# Altium PCB Coil_v3r1.PcbDoc (part 5 of 5)
Units mm, origin at the board's own origin, x right, y up, seen from the top; angles counter-clockwise.
Board outline 72 x 72 mm, 4 copper layers (Top Layer, Signal Layer 1, Signal Layer 2, Bottom Layer), stack 0.778 mm thick; 2 components, 0 nets, 15 pads, 374 vias.
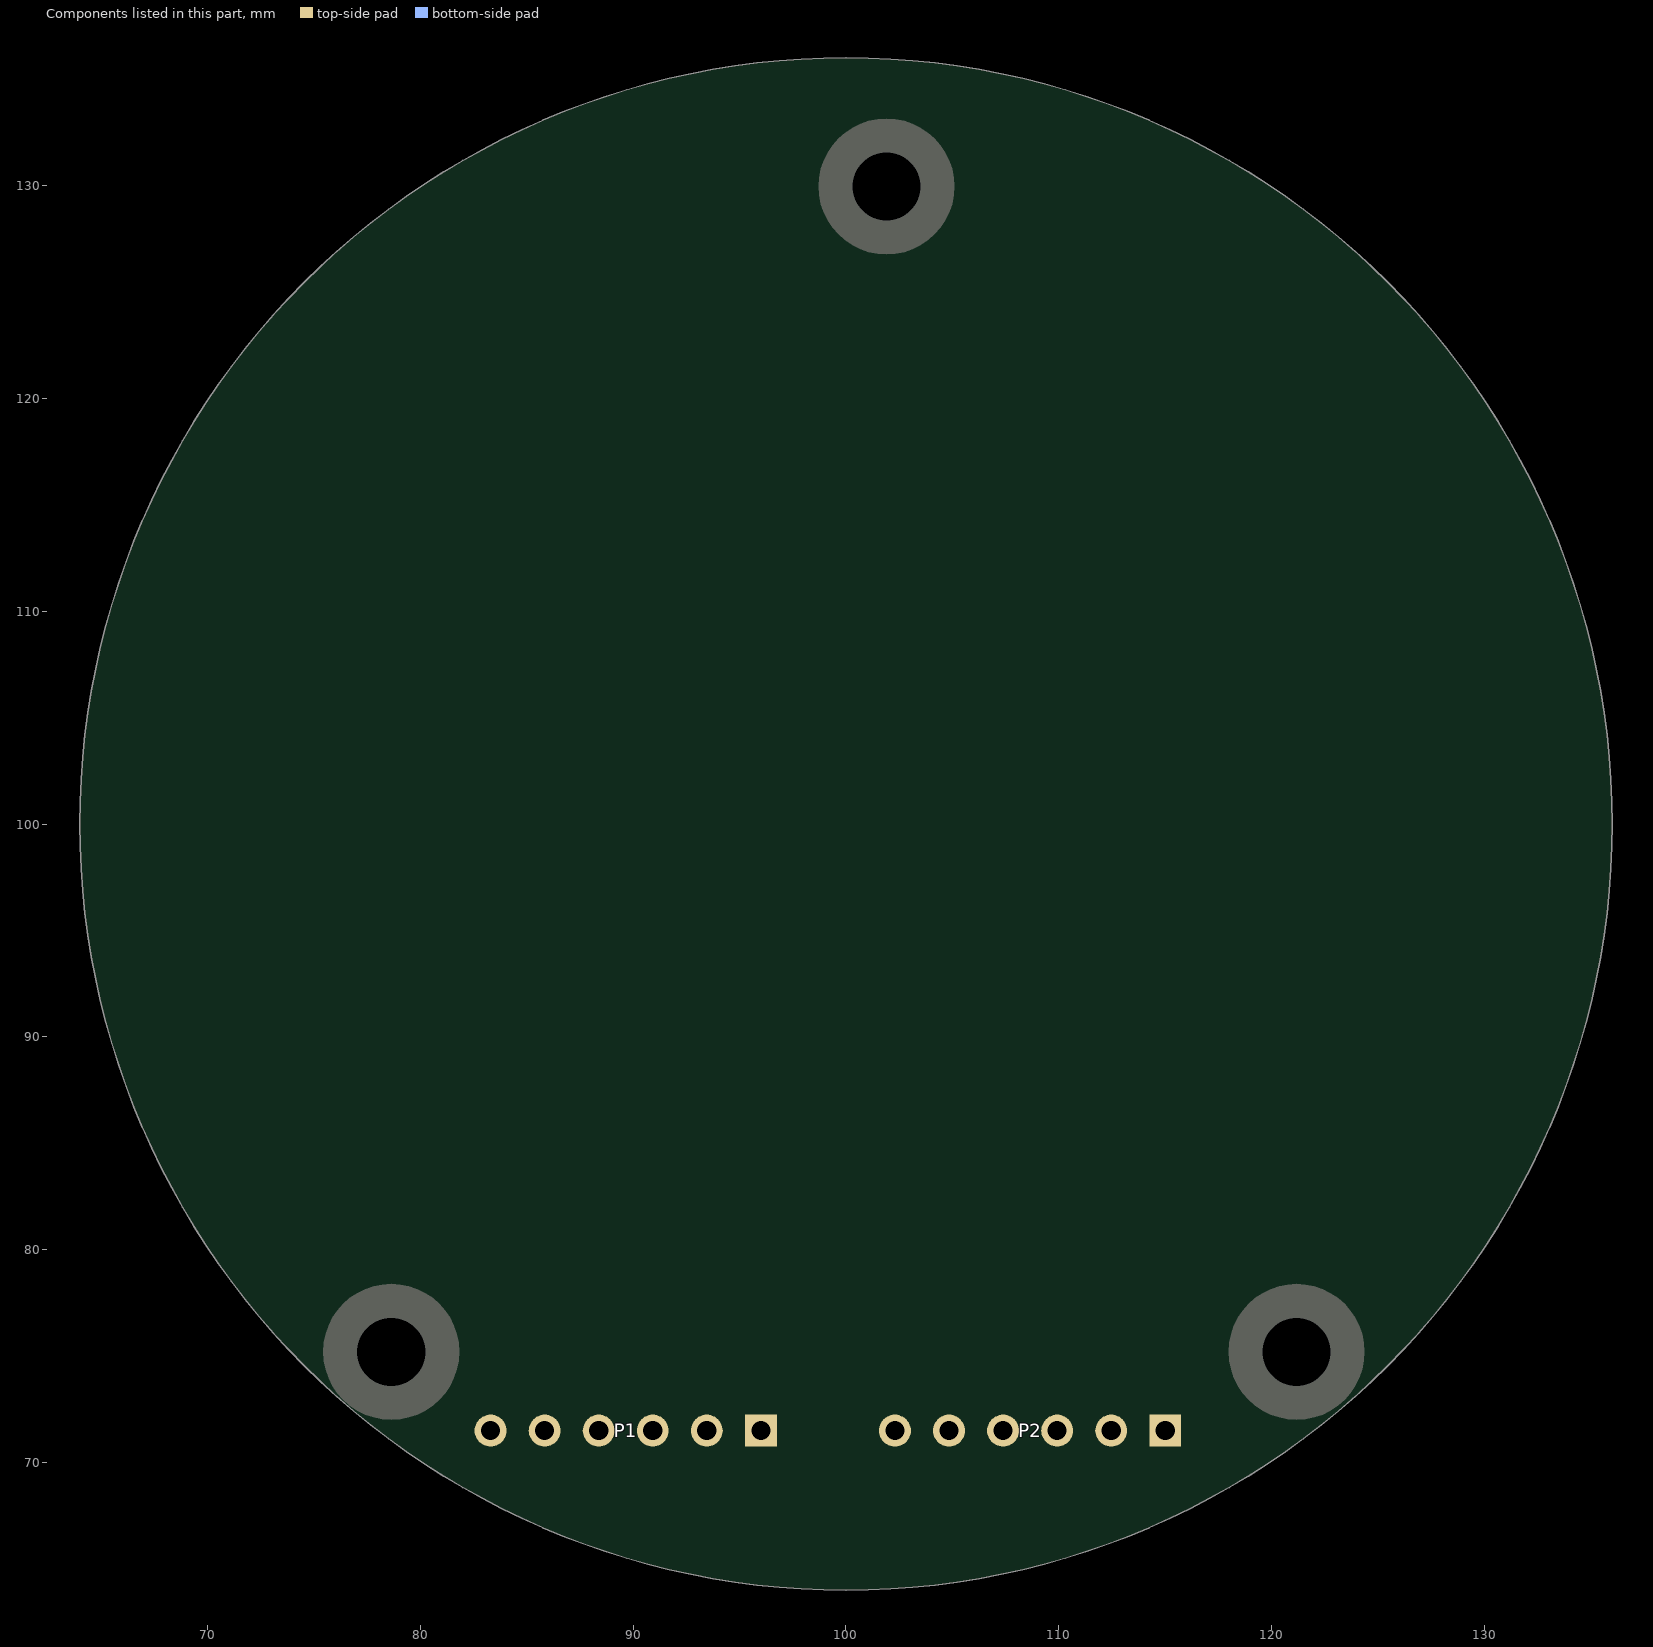
[diagram p7: the components of this part, seen from the top]

## Via types
v1: diameter 0.406, hole 0.305, Top Layer to Bottom Layer, 374 vias

## Nets (pads, with @x,y where several pads share a name; then routed paths per layer and width w, separated by ;. In a path a pad name is that pad's centre, name@x,y a point inside that pad or via, vN(x,y) a via of type N, cw(c..) or ccw(c..) an arc to the next point about the centre after c; other vN are vias at no path point) (continued)
copper on no net: (continued)
  Signal Layer 2 w0.1: v1(107.408,101.173) 107.433,101.124 107.491,101.079 107.582,101.039 107.705,101.001 107.86,100.965 108.043,100.931 108.254,100.897 108.49,100.862 108.749,100.827 109.028,100.79 109.324,100.75 109.633,100.707 109.953,100.661 110.28,100.611 110.61,100.556 110.94,100.497 111.266,100.433 111.585,100.364 111.893,100.291 112.186,100.213 112.461,100.13 112.716,100.044 112.947,99.955 113.152,99.862 113.329,99.767 113.476,99.671 113.59,99.573 113.672,99.475 113.719,99.377 v1(113.731,99.28) ; v1(107.482,115.82) 107.593,115.786 107.72,115.784 107.862,115.811 108.02,115.867 108.193,115.951 108.383,116.06 108.587,116.192 108.806,116.346 109.039,116.518 109.284,116.706 109.541,116.907 109.808,117.118 110.084,117.335 110.367,117.556 110.655,117.776 110.946,117.994 111.239,118.206 111.531,118.408 111.82,118.598 112.105,118.774 112.382,118.931 112.651,119.068 112.909,119.183 113.154,119.273 113.384,119.338 113.598,119.375 113.795,119.385 113.973,119.365 114.13,119.316 v1(114.267,119.237) ; v1(107.49,99.607) 107.504,99.554 107.552,99.498 107.632,99.44 107.745,99.377 107.889,99.31 108.061,99.238 108.26,99.161 108.484,99.078 108.73,98.99 108.995,98.896 109.276,98.795 109.57,98.689 109.873,98.577 110.183,98.46 110.494,98.338 110.805,98.211 111.11,98.081 111.407,97.947 111.693,97.812 111.964,97.675 112.216,97.537 112.447,97.4 112.655,97.264 112.836,97.131 112.99,97.001 113.113,96.876 113.205,96.757 113.264,96.644 113.289,96.538 v1(113.281,96.441) ; v1(107.49,100.393) 107.509,100.341 107.563,100.291 107.649,100.24 107.768,100.19 107.917,100.138 108.096,100.085 108.303,100.029 108.534,99.97 108.788,99.908 109.061,99.842 109.351,99.771 109.655,99.697 109.968,99.617 110.288,99.533 110.61,99.444 110.932,99.35 111.25,99.253 111.56,99.151 111.858,99.046 112.141,98.938 112.407,98.827 112.651,98.715 112.872,98.602 113.066,98.488 113.232,98.375 113.368,98.264 113.471,98.155 113.542,98.049 113.578,97.946 v1(113.581,97.849) ; v1(108.069,77.45) 108.21,77.52 108.338,77.624 108.454,77.76 108.555,77.929 108.643,78.128 108.717,78.355 108.778,78.61 108.826,78.888 108.861,79.187 108.885,79.505 108.897,79.839 108.9,80.185 108.894,80.541 108.88,80.902 108.861,81.265 108.837,81.627 108.811,81.985 108.784,82.335 108.757,82.674 108.733,82.999 108.713,83.308 108.699,83.597 108.693,83.864 108.696,84.108 108.711,84.326 108.738,84.517 108.779,84.679 108.835,84.812 108.907,84.916 v1(108.997,84.99) ; v1(108.997,115.01) 109.104,114.966 109.23,114.951 109.374,114.964 109.536,115.005 109.717,115.071 109.916,115.161 110.133,115.273 110.366,115.404 110.614,115.553 110.877,115.716 111.152,115.89 111.439,116.074 111.735,116.263 112.038,116.455 112.346,116.646 112.657,116.835 112.969,117.017 113.28,117.19 113.586,117.35 113.886,117.497 114.178,117.626 114.459,117.736 114.727,117.825 114.979,117.891 115.215,117.933 115.432,117.949 115.629,117.939 115.804,117.902 115.956,117.837 v1(116.084,117.746) ; v1(110.24,78.349) 110.374,78.433 110.492,78.549 110.593,78.696 110.677,78.874 110.745,79.08 110.797,79.314 110.833,79.573 110.853,79.854 110.859,80.156 110.851,80.475 110.83,80.808 110.799,81.153 110.758,81.506 110.71,81.864 110.655,82.224 110.596,82.582 110.534,82.935 110.473,83.281 110.413,83.616 110.357,83.937 110.307,84.242 110.265,84.528 110.233,84.794 110.212,85.037 110.205,85.255 110.213,85.448 110.238,85.613 110.281,85.751 110.343,85.862 v1(110.425,85.944) ; v1(110.425,114.056) 110.527,114.002 110.651,113.975 110.795,113.974 110.961,113.998 111.148,114.046 111.355,114.116 111.581,114.206 111.826,114.314 112.088,114.437 112.365,114.574 112.656,114.721 112.959,114.875 113.272,115.034 113.593,115.196 113.918,115.356 114.246,115.513 114.575,115.664 114.901,115.805 115.221,115.935 115.534,116.051 115.837,116.151 116.128,116.234 116.403,116.296 116.661,116.337 116.9,116.355 117.117,116.35 117.312,116.321 117.482,116.267 117.627,116.188 v1(117.746,116.084) ; v1(111.752,87.033) 111.679,86.944 111.628,86.828 111.599,86.686 111.591,86.519 111.601,86.326 111.63,86.11 111.674,85.87 111.732,85.609 111.802,85.328 111.881,85.029 111.969,84.715 112.061,84.388 112.156,84.05 112.252,83.704 112.346,83.354 112.436,83.001 112.519,82.65 112.594,82.302 112.659,81.962 112.712,81.633 112.751,81.316 112.775,81.015 112.783,80.733 112.773,80.472 112.744,80.234 112.697,80.022 112.63,79.837 112.544,79.68 112.438,79.554 v1(112.313,79.457) ; v1(111.752,112.967) 111.849,112.902 111.969,112.863 112.113,112.848 112.28,112.856 112.471,112.886 112.684,112.935 112.918,113.002 113.172,113.086 113.444,113.183 113.734,113.292 114.038,113.409 114.355,113.533 114.682,113.661 115.016,113.79 115.356,113.918 115.698,114.042 116.04,114.16 116.378,114.269 116.71,114.366 117.033,114.451 117.344,114.521 117.641,114.575 117.921,114.61 118.182,114.625 118.421,114.62 118.637,114.594 118.828,114.545 118.992,114.475 119.129,114.382 v1(119.237,114.267) ; v1(112.967,88.248) 112.902,88.151 112.863,88.031 112.848,87.887 112.856,87.72 112.886,87.529 112.935,87.316 113.002,87.082 113.086,86.828 113.183,86.556 113.292,86.266 113.409,85.962 113.533,85.645 113.661,85.318 113.79,84.984 113.918,84.644 114.042,84.302 114.16,83.96 114.269,83.622 114.366,83.29 114.451,82.967 114.521,82.656 114.575,82.359 114.61,82.079 114.625,81.818 114.62,81.579 114.594,81.363 114.545,81.172 114.475,81.008 114.382,80.871 v1(114.267,80.763) ; v1(112.967,111.752) 113.056,111.679 113.172,111.628 113.314,111.599 113.481,111.591 113.674,111.601 113.89,111.63 114.13,111.674 114.391,111.732 114.672,111.802 114.971,111.881 115.285,111.969 115.612,112.061 115.95,112.156 116.296,112.252 116.646,112.346 116.999,112.436 117.35,112.519 117.698,112.594 118.038,112.659 118.367,112.712 118.684,112.751 118.985,112.775 119.267,112.783 119.528,112.773 119.766,112.744 119.978,112.697 120.163,112.63 120.32,112.544 120.446,112.438 v1(120.543,112.313) ; v1(114.056,89.575) 114.002,89.473 113.975,89.349 113.974,89.205 113.998,89.039 114.046,88.852 114.116,88.645 114.206,88.419 114.314,88.174 114.437,87.912 114.574,87.635 114.721,87.344 114.875,87.041 115.034,86.728 115.196,86.407 115.356,86.082 115.513,85.754 115.664,85.425 115.805,85.099 115.935,84.779 116.051,84.466 116.151,84.163 116.234,83.872 116.296,83.597 116.337,83.339 116.355,83.1 116.35,82.883 116.321,82.688 116.267,82.518 116.188,82.373 v1(116.084,82.254) ; v1(114.056,110.425) 114.138,110.343 114.249,110.281 114.387,110.238 114.552,110.213 114.745,110.205 114.963,110.212 115.206,110.233 115.472,110.265 115.758,110.307 116.063,110.357 116.384,110.413 116.719,110.473 117.065,110.534 117.418,110.596 117.776,110.655 118.136,110.71 118.494,110.758 118.847,110.799 119.192,110.83 119.525,110.851 119.844,110.859 120.146,110.853 120.427,110.833 120.686,110.797 120.92,110.745 121.126,110.677 121.304,110.593 121.451,110.492 121.567,110.374 v1(121.651,110.24) ; v1(115.01,91.003) 114.966,90.896 114.951,90.77 114.964,90.626 115.005,90.464 115.071,90.283 115.161,90.084 115.273,89.867 115.404,89.634 115.553,89.386 115.716,89.123 115.89,88.848 116.074,88.561 116.263,88.265 116.455,87.962 116.646,87.654 116.835,87.343 117.017,87.031 117.19,86.72 117.35,86.414 117.497,86.114 117.626,85.822 117.736,85.541 117.825,85.273 117.891,85.021 117.933,84.785 117.949,84.568 117.939,84.371 117.902,84.196 117.837,84.044 v1(117.746,83.916) ; v1(115.01,108.997) 115.084,108.907 115.188,108.835 115.321,108.779 115.483,108.738 115.674,108.711 115.892,108.696 116.136,108.693 116.403,108.699 116.692,108.713 117.001,108.733 117.326,108.757 117.665,108.784 118.015,108.811 118.373,108.837 118.735,108.861 119.098,108.88 119.459,108.894 119.815,108.9 120.161,108.897 120.495,108.885 120.813,108.861 121.112,108.826 121.39,108.778 121.645,108.717 121.872,108.643 122.071,108.555 122.24,108.454 122.376,108.338 122.48,108.21 v1(122.55,108.069) ; v1(115.82,92.518) 115.786,92.407 115.784,92.28 115.811,92.138 115.867,91.98 115.951,91.807 116.06,91.617 116.192,91.413 116.346,91.194 116.518,90.961 116.706,90.716 116.907,90.459 117.118,90.192 117.335,89.916 117.556,89.633 117.776,89.345 117.994,89.054 118.206,88.761 118.408,88.469 118.598,88.18 118.774,87.895 118.931,87.618 119.068,87.349 119.183,87.091 119.273,86.846 119.338,86.616 119.375,86.402 119.385,86.205 119.365,86.027 119.316,85.87 v1(119.237,85.733) ; v1(115.82,107.482) 115.884,107.386 115.98,107.304 116.108,107.235 116.265,107.178 116.453,107.132 116.668,107.097 116.91,107.069 117.177,107.049 117.466,107.035 117.775,107.024 118.101,107.016 118.441,107.01 118.792,107.003 119.151,106.994 119.513,106.982 119.877,106.966 120.237,106.944 120.592,106.915 120.936,106.878 121.267,106.833 121.581,106.779 121.876,106.714 122.148,106.639 122.395,106.554 122.614,106.458 122.803,106.351 122.961,106.233 123.086,106.105 123.177,105.967 v1(123.232,105.819) ; v1(116.477,94.104) 116.455,93.991 116.464,93.865 116.506,93.726 116.577,93.574 116.677,93.41 116.804,93.232 116.956,93.041 117.13,92.839 117.325,92.624 117.536,92.398 117.761,92.162 117.996,91.917 118.24,91.664 118.487,91.404 118.735,91.139 118.981,90.87 119.22,90.6 119.45,90.329 119.668,90.06 119.87,89.794 120.053,89.533 120.216,89.279 120.356,89.034 120.47,88.799 120.557,88.576 120.615,88.366 120.643,88.171 120.641,87.993 120.608,87.831 v1(120.543,87.687) ; v1(116.477,105.896) 116.532,105.793 116.619,105.702 116.739,105.621 116.891,105.549 117.072,105.485 117.283,105.429 117.522,105.378 117.785,105.332 118.071,105.289 118.378,105.248 118.702,105.208 119.039,105.168 119.388,105.127 119.744,105.083 120.104,105.036 120.464,104.984 120.821,104.927 121.17,104.863 121.509,104.793 121.834,104.716 122.142,104.631 122.429,104.538 122.692,104.437 122.929,104.327 123.138,104.21 123.316,104.085 123.462,103.952 123.573,103.813 123.65,103.666 v1(123.691,103.514) ; v1(116.976,95.748) 116.964,95.632 116.987,95.508 117.041,95.374 117.127,95.23 117.243,95.076 117.387,94.912 117.556,94.737 117.75,94.552 117.964,94.357 118.196,94.153 118.443,93.941 118.702,93.72 118.969,93.492 119.241,93.257 119.513,93.018 119.784,92.775 120.049,92.529 120.304,92.282 120.547,92.035 120.774,91.791 120.983,91.549 121.17,91.312 121.333,91.082 121.469,90.859 121.578,90.646 121.656,90.443 121.703,90.252 121.719,90.074 121.701,89.909 v1(121.651,89.76) ; v1(116.976,104.252) 117.02,104.145 117.098,104.046 117.21,103.953 117.353,103.867 117.528,103.786 117.732,103.709 117.964,103.634 118.222,103.563 118.503,103.492 118.804,103.421 119.122,103.35 119.454,103.277 119.797,103.202 120.147,103.123 120.501,103.041 120.854,102.954 121.203,102.862 121.545,102.765 121.875,102.662 122.191,102.553 122.489,102.438 122.765,102.317 123.018,102.191 123.243,102.059 123.439,101.922 123.604,101.78 123.736,101.634 123.833,101.484 123.895,101.331 v1(123.921,101.175) ; v1(117.311,97.432) 117.311,97.316 117.345,97.195 117.412,97.067 117.512,96.932 117.642,96.79 117.802,96.64 117.988,96.483 118.198,96.318 118.431,96.145 118.682,95.965 118.949,95.778 119.228,95.583 119.516,95.382 119.809,95.176 120.104,94.964 120.397,94.749 120.684,94.53 120.963,94.309 121.229,94.088 121.479,93.866 121.71,93.646 121.919,93.429 122.104,93.216 122.262,93.008 122.391,92.806 122.489,92.612 122.554,92.426 122.587,92.25 122.586,92.085 v1(122.55,91.931) ; v1(117.311,102.568) 117.345,102.457 117.413,102.35 117.514,102.248 117.649,102.147 117.815,102.049 118.01,101.953 118.234,101.856 118.484,101.759 118.756,101.662 119.049,101.562 119.358,101.46 119.682,101.355 120.016,101.246 120.356,101.134 120.7,101.017 121.043,100.896 121.382,100.77 121.712,100.64 122.031,100.505 122.335,100.365 122.62,100.222 122.883,100.075 123.122,99.924 123.333,99.771 123.515,99.615 123.665,99.458 123.782,99.299 123.864,99.141 123.911,98.982 v1(123.921,98.825) ; v1(117.479,99.141) 117.491,99.026 117.537,98.908 117.616,98.787 117.728,98.663 117.872,98.535 118.045,98.401 118.246,98.263 118.472,98.12 118.72,97.971 118.987,97.816 119.271,97.655 119.568,97.489 119.874,97.317 120.186,97.141 120.501,96.959 120.813,96.773 121.121,96.584 121.42,96.392 121.706,96.197 121.977,96.001 122.228,95.805 122.458,95.609 122.662,95.415 122.84,95.223 122.988,95.035 123.104,94.851 123.188,94.673 123.238,94.501 123.253,94.337 v1(123.232,94.181) ; v1(117.479,100.859) 117.502,100.745 117.559,100.632 117.65,100.52 117.774,100.407 117.93,100.293 118.115,100.178 118.328,100.06 118.567,99.939 118.828,99.815 119.11,99.687 119.408,99.555 119.72,99.419 120.041,99.278 120.369,99.133 120.7,98.983 121.03,98.829 121.354,98.671 121.67,98.508 121.974,98.343 122.263,98.175 122.532,98.004 122.78,97.832 123.003,97.658 123.198,97.485 123.364,97.312 123.498,97.141 123.599,96.972 123.665,96.806 123.696,96.643 v1(123.691,96.486)
  Bottom Layer w0.1: 96,71.5 96,72.729 96.296,73.025 98.679,73.025 100,74.346 100,74.8 100.5,75.005 ccw(c100,100) 99.5,75.005 100.5,75.205 ccw(c100,100) 99.5,75.205 100.5,75.405 ccw(c100,100) 99.5,75.405 100.5,75.605 ccw(c100,100) 99.5,75.605 v1(100,75.8) ; v1(100,86) 99.5,85.809 cw(c100,100) 100.5,85.809 99.5,85.609 cw(c100,100) 100.5,85.609 99.5,85.409 cw(c100,100) 100.5,85.409 99.5,85.208 cw(c100,100) 100.5,85.208 99.5,85.008 cw(c100,100) 100.5,85.008 100,84.8 100,84.382 ccw(c100.859,84.382) 100.859,83.523 v1(101.73,83.523)
  other v1: 97.432,82.689 97.432,82.689 97.432,82.689 97.432,82.689 97.432,82.689 97.432,82.689 97.432,82.689 97.432,82.689 97.432,82.689 97.432,82.689 97.432,82.689 97.432,82.689 97.432,82.689 97.432,82.689 97.432,82.689 95.748,83.024 95.748,83.024 95.748,83.024 95.748,83.024 95.748,83.024 95.748,83.024 95.748,83.024 95.748,83.024 95.748,83.024 95.748,83.024 95.748,83.024 95.748,83.024 95.748,83.024 95.748,83.024 95.748,83.024 98.827,92.592 98.827,92.592 98.827,92.592 98.827,92.592 98.827,92.592 98.827,92.592 98.827,92.592 98.827,92.592 98.827,92.592 98.827,92.592 98.827,92.592 98.827,92.592 98.827,92.592 98.827,92.592 98.059,92.756 98.059,92.756 98.059,92.756 98.059,92.756 98.059,92.756 98.059,92.756 98.059,92.756 98.059,92.756 98.059,92.756 98.059,92.756 98.059,92.756 98.059,92.756 98.059,92.756 98.059,92.756 103.559,113.281 103.559,113.281 103.559,113.281 103.559,113.281 103.559,113.281 103.559,113.281 103.559,113.281 103.559,113.281 103.559,113.281 103.559,113.281 103.559,113.281 103.559,113.281 103.559,113.281 103.559,113.281 102.151,113.581 102.151,113.581 102.151,113.581 102.151,113.581 102.151,113.581 102.151,113.581 102.151,113.581 102.151,113.581 102.151,113.581 102.151,113.581 102.151,113.581 102.151,113.581 102.151,113.581 102.151,113.581 104.252,116.976 104.252,116.976 104.252,116.976 104.252,116.976 104.252,116.976 104.252,116.976 104.252,116.976 104.252,116.976 104.252,116.976 104.252,116.976 104.252,116.976 104.252,116.976 104.252,116.976 104.252,116.976 104.252,116.976 102.568,117.311 102.568,117.311 102.568,117.311 102.568,117.311 102.568,117.311 102.568,117.311 102.568,117.311 102.568,117.311 102.568,117.311 102.568,117.311 102.568,117.311 102.568,117.311 102.568,117.311 102.568,117.311 102.568,117.311

## Keep-outs
Keep-Out Layer:
  circle w0.254: c100,100 r36

## Silkscreen, mask and mechanical layers (free items; w line width, h text height)
Top Overlay:
  circle w0.254: c100,100 r5
  circle w0.254: c100,100 r26
  circle w0.254: c100,100 r36
  circle w0.2: c101.903,129.954 r3
  circle w0.1: c121.17,75.204 r3
  text "Coil_v3r1" at 97.561,115.672 h2
Mechanical 1:
  circle w0.254: c100,100 r5
  circle w0.254: c100,100 r36